# Altium PCB PCB.PcbDoc (part 1 of 2)
Units mil, origin at the board's own origin, x right, y up, seen from the top; angles counter-clockwise.
Board outline 1030 x 1437.5 mil, 4 copper layers (Top Layer, Layer 1, Layer 2, Bottom Layer), stack 23.756 mil thick; 67 components, 63 nets, 297 pads, 88 vias.
Unrouted connection lines stored in the file: 37.
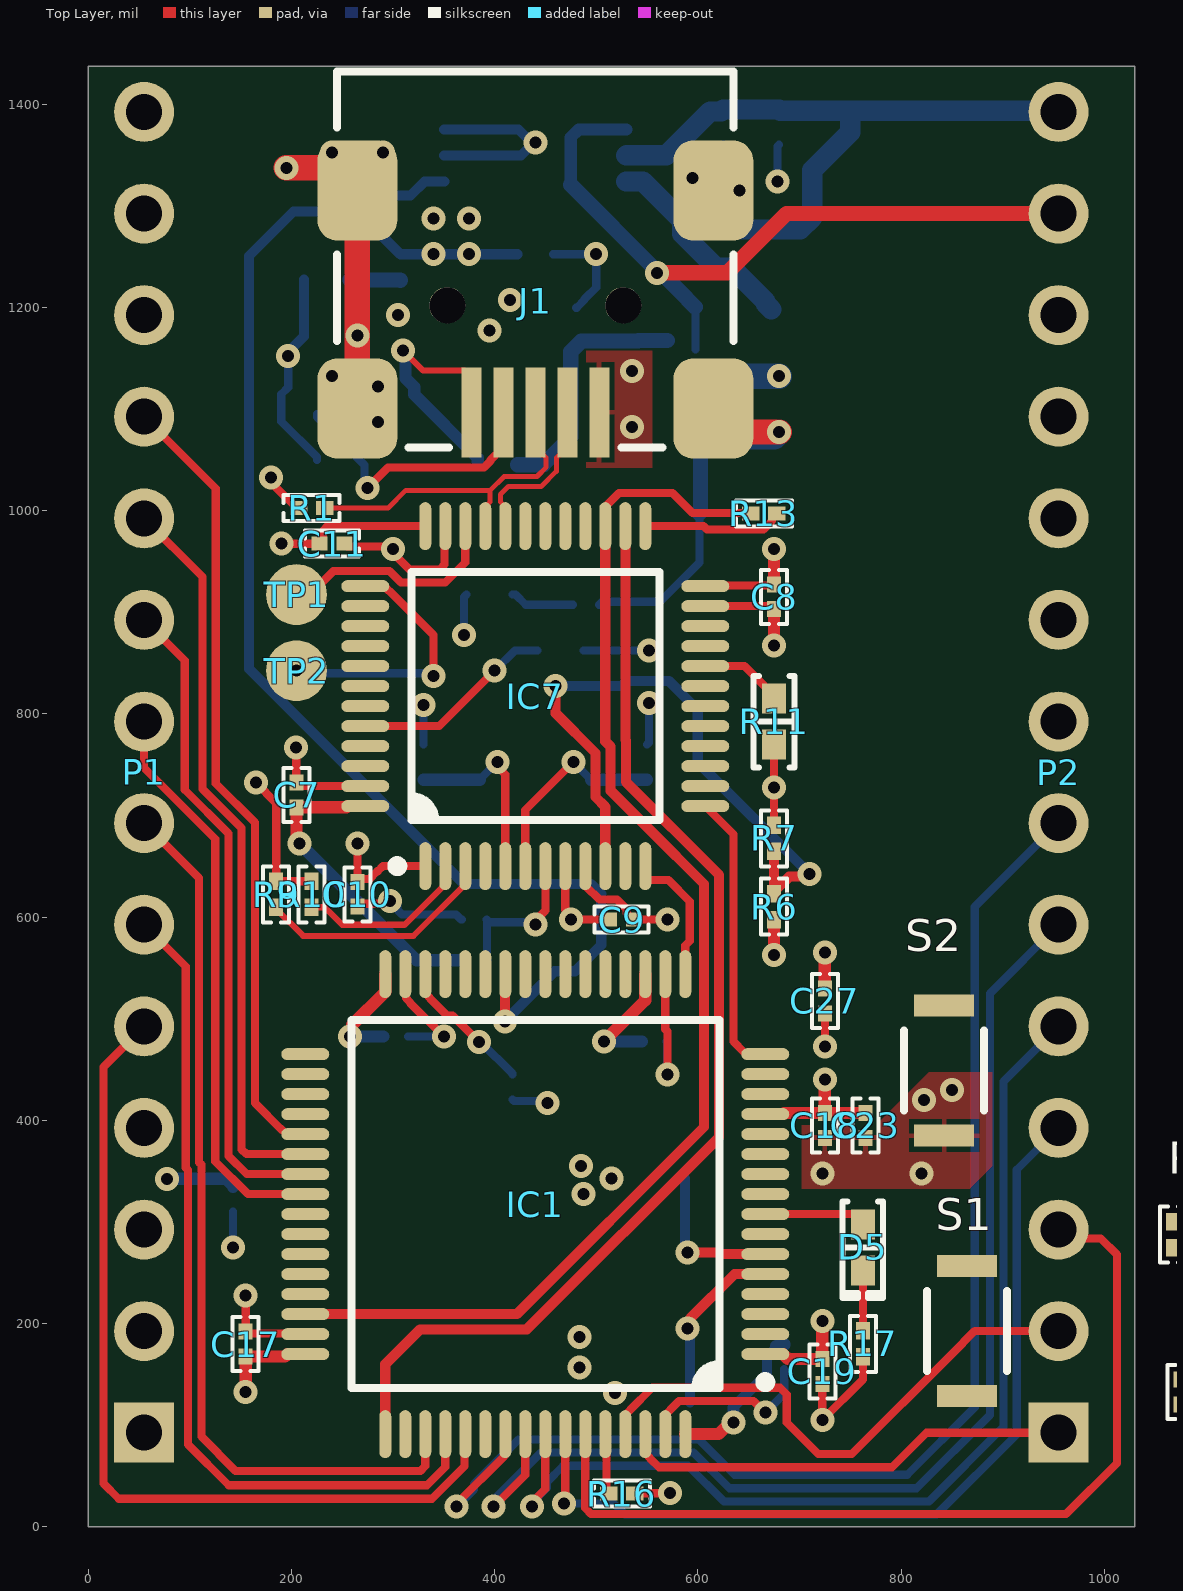
[diagram p0: Top Layer view]
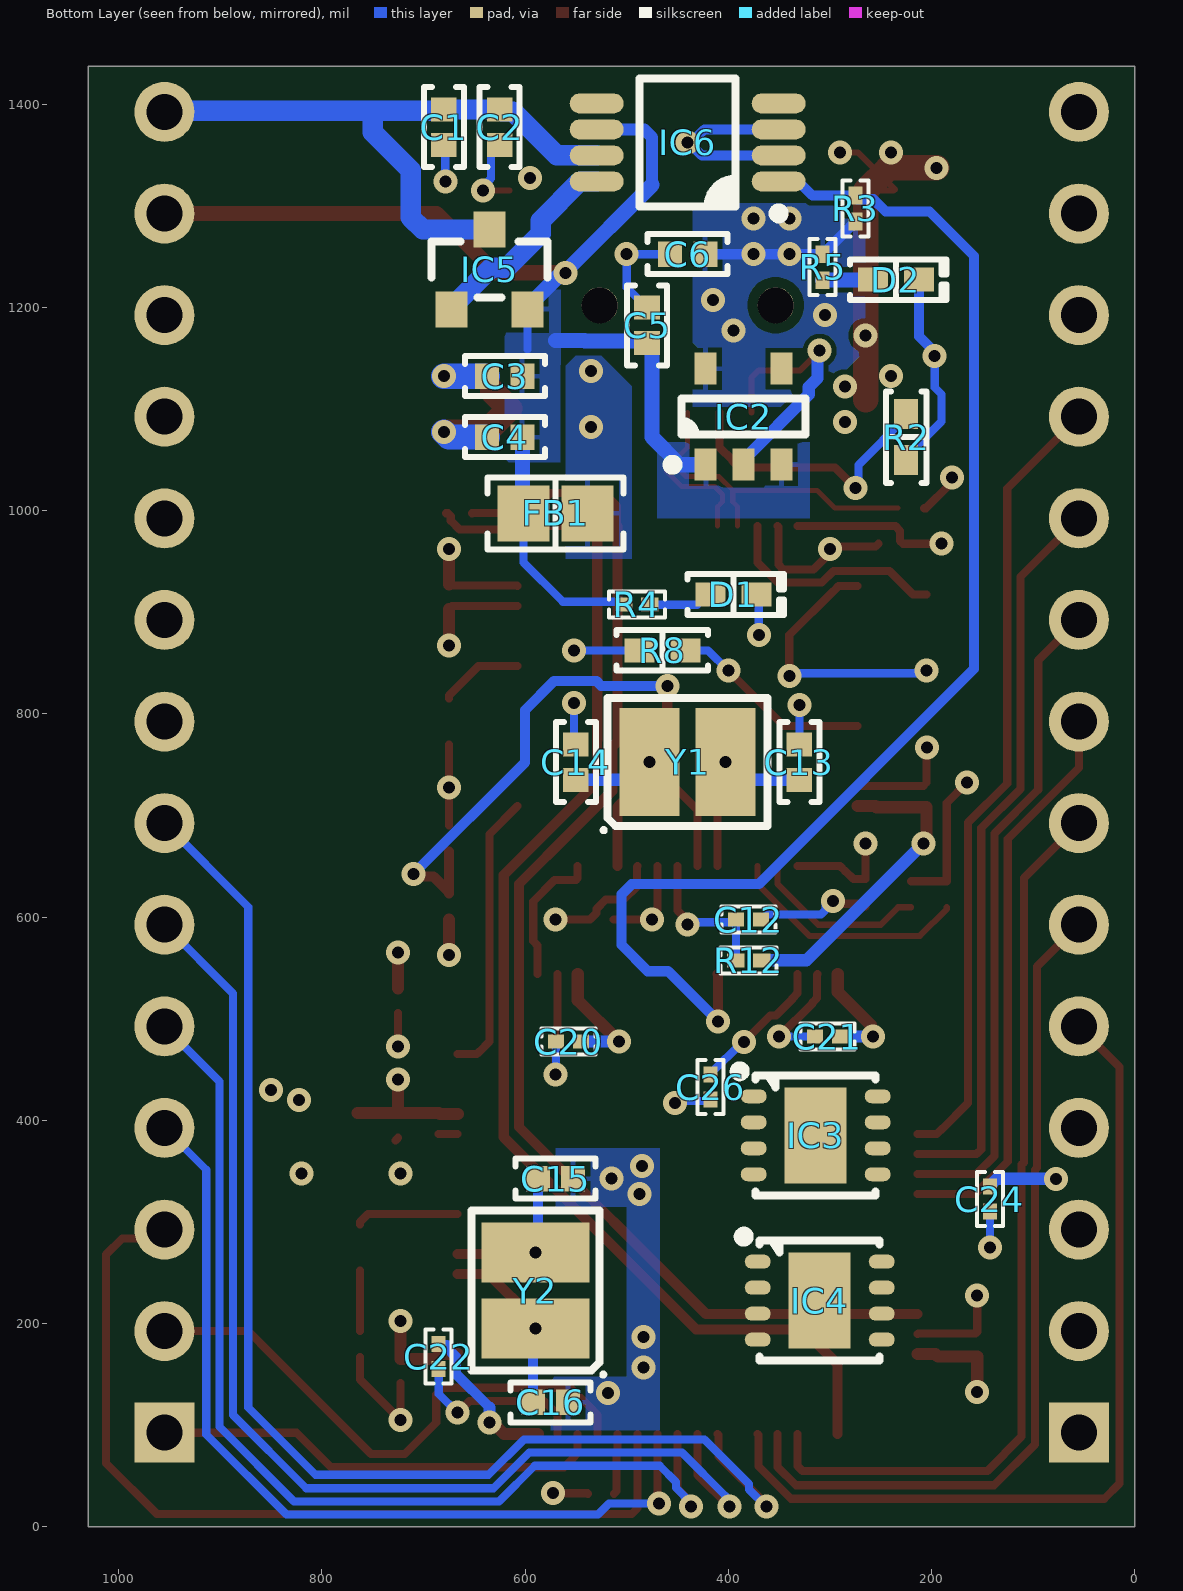
[diagram p1: Bottom Layer view, seen from below]
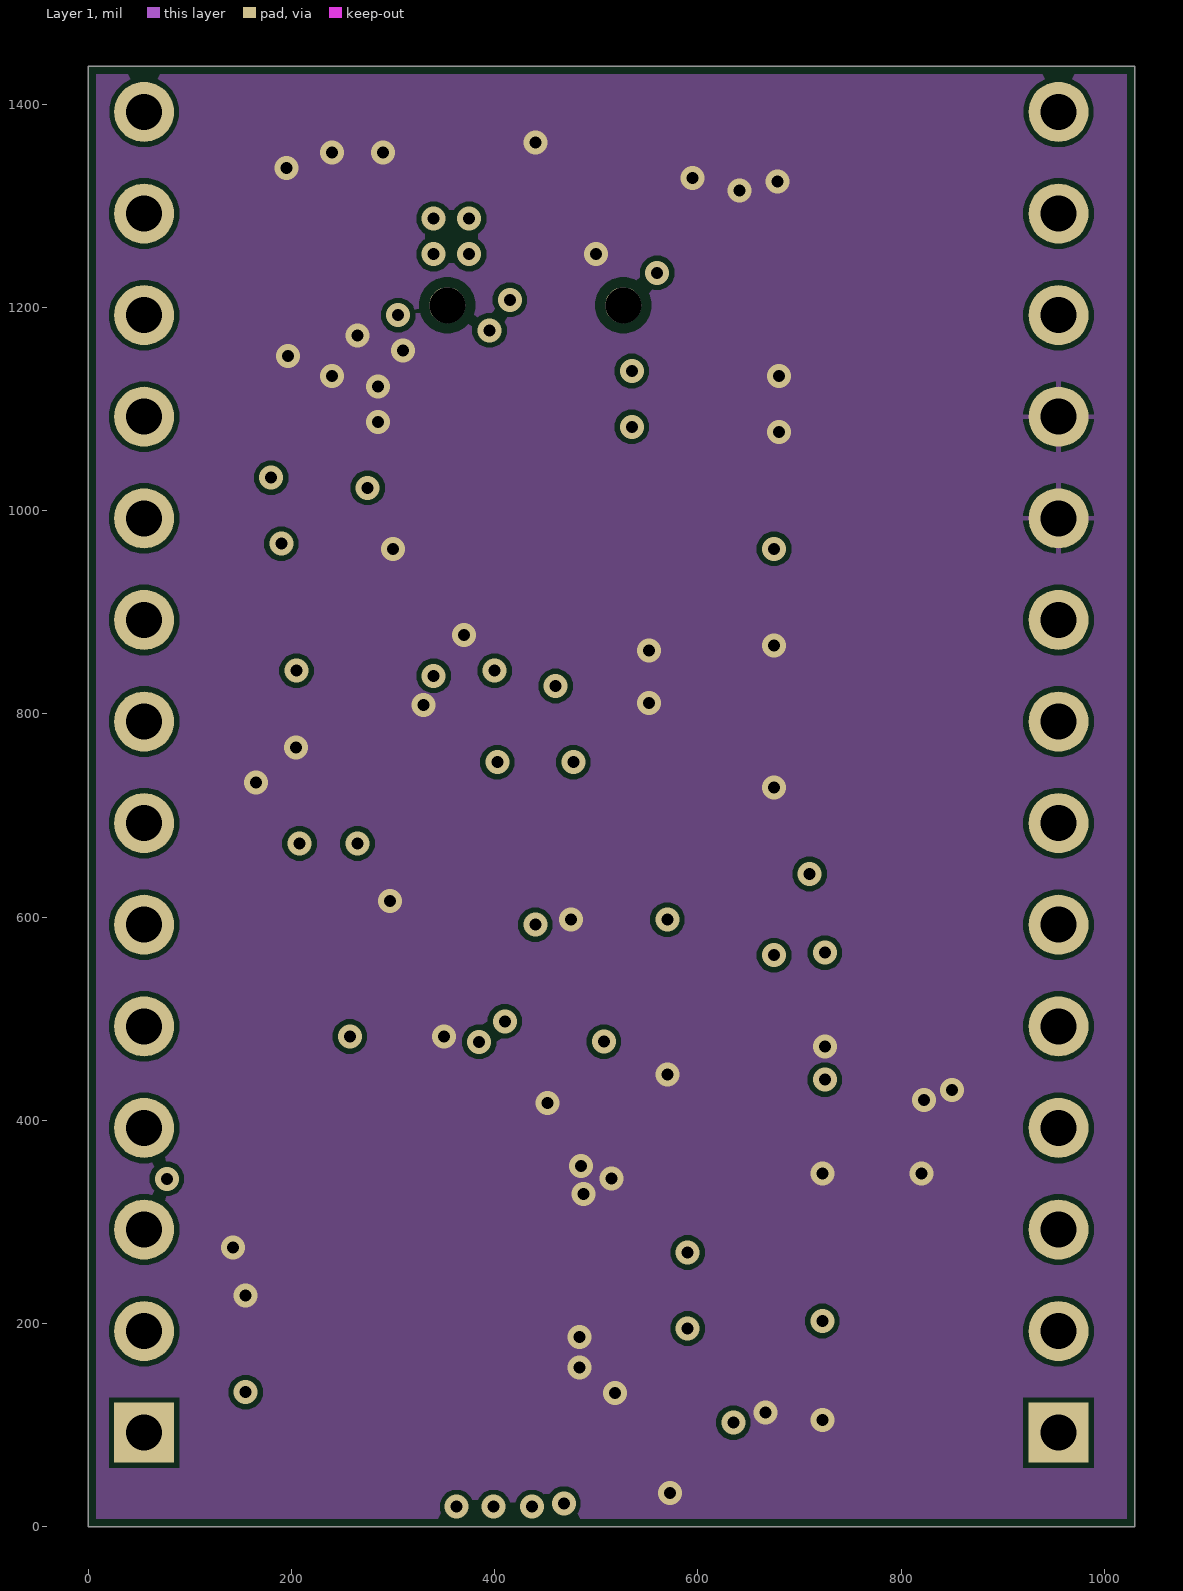
[diagram p2: Layer 1]
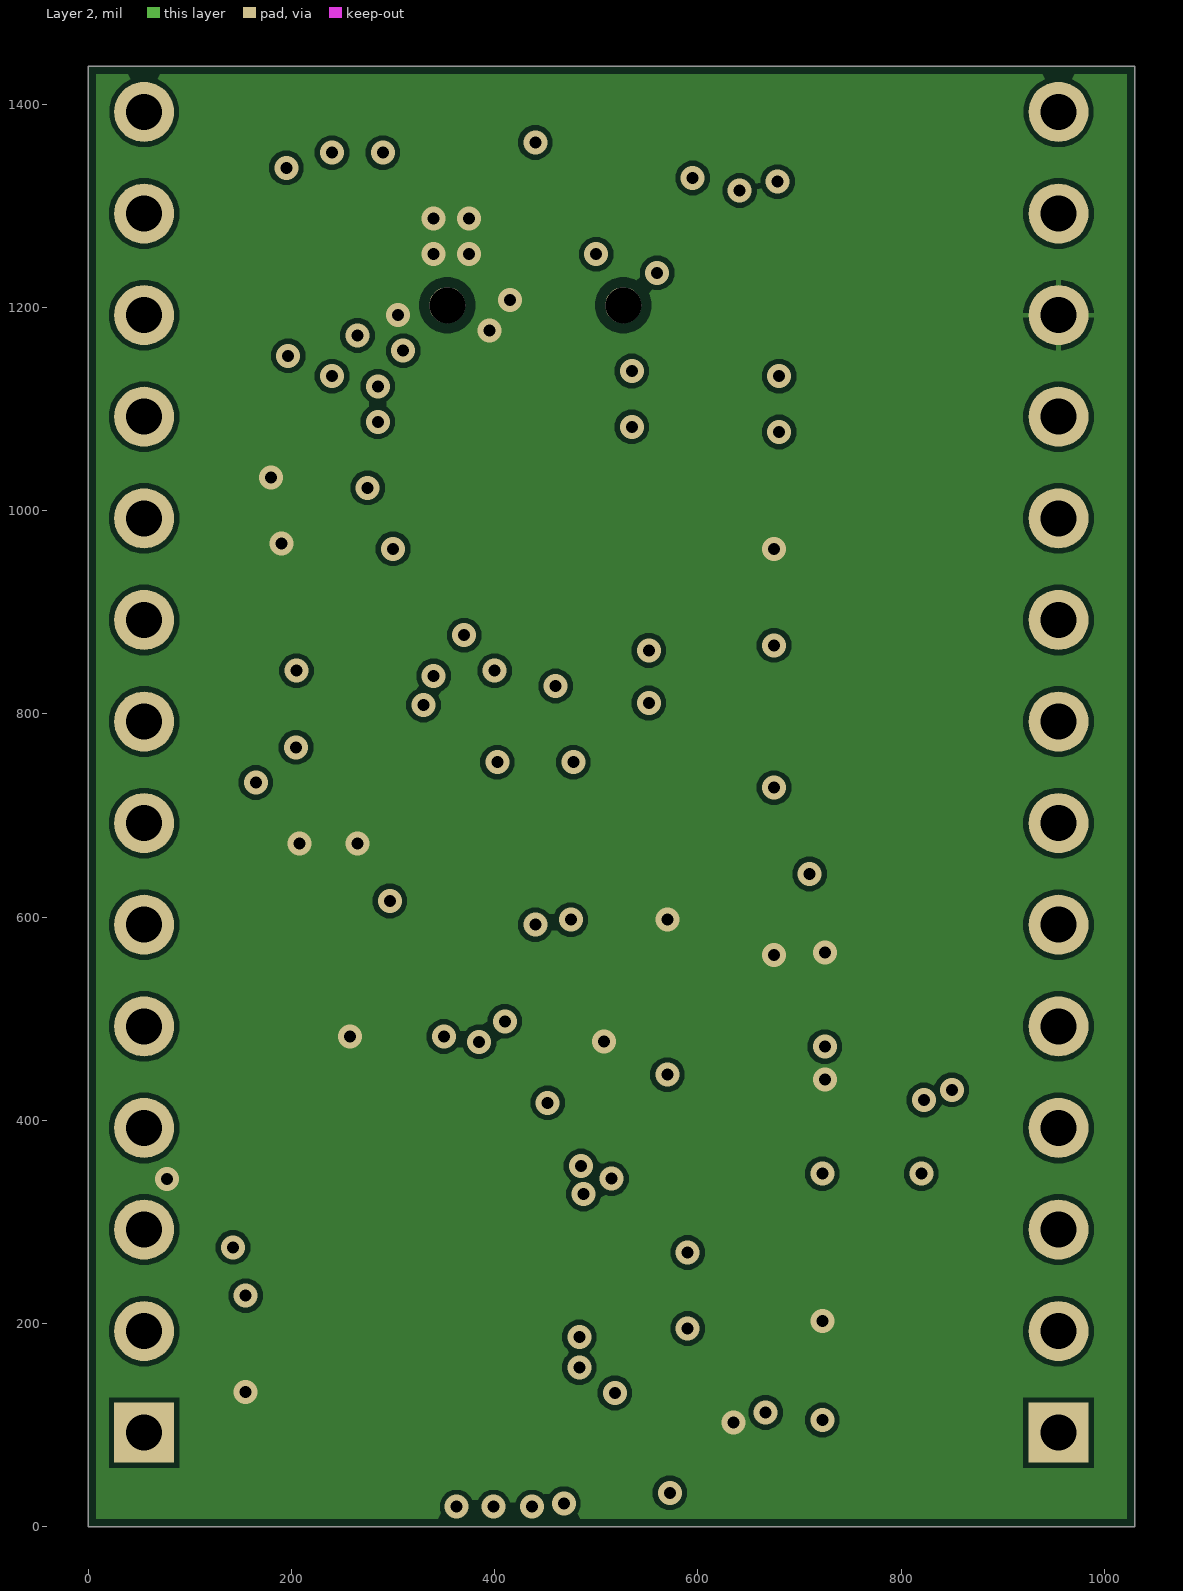
[diagram p3: Layer 2]

## Layer stack, top to bottom
Top Solder: solder mask 0.4, Solder Resist, Dk 3.5
Top Layer: signal copper 1.4
Dielectric 2: prepreg 2.8, PP-006, Dk 4.1
Layer 1: signal copper 1.378
Dielectric 1: dielectric 12.6, FR-4, Dk 4.8
Layer 2: signal copper 1.378
Dielectric 3: prepreg 2.8, PP-006, Dk 4.1
Bottom Layer: signal copper 1.4
Bottom Solder: solder mask 0.4, Solder Resist, Dk 3.5

## Board outline
0,0 1030,0 1030,1437.5 0,1437.5

## Design rules (kind name [scope] priority, off if disabled: settings)
BoardOutlineClearance [All] p1: gap=7.87 ignorepadtopadclearanceinfootprint=FALSE
Clearance [All] p1: gap=5 ignorepadtopadclearanceinfootprint=FALSE except(9.84: Arc-Hole Track-Hole SMDPad-Hole THPad-Hole Via-Hole Fill-Hole Poly-Hole Region-Hole Text-Hole)
ComponentClearance [All] p1: gap=5 collisioncheckmode=3 verticalgap=5 showdistances=TRUE
DiffPairsRouting [All] p1: maxlimit=10 minlimit=5 mostfreqgap=10 toplayer_prefgap=5 toplayer_minwidth=5 toplayer_maxwidth=1000 toplayer_prefwidth=5 midlayer1_mingap=10 midlayer1_minwidth=15 midlayer1_maxwidth=15 midlayer1_prefwidth=15 midlayer2_mingap=10 midlayer2_minwidth=15 midlayer2_maxwidth=15 midlayer2_prefwidth=15 bottomlayer_prefgap=5 bottomlayer_minwidth=5 bottomlayer_maxwidth=1000 bottomlayer_prefwidth=5 maxuncoupledlength=500
Height [All] p1: minheight=0 maxheight=71497.94 prefheight=500
HoleSize [All] p1: absolutevalues=TRUE maxlimit=248.03 minlimit=11.81 maxpercent=80.000 minpercent=20.000
HoleToHoleClearance [All] p1: gap=9.84 allowstackedmicrovias=FALSE
MinimumAnnularRing [All] p1: minimumring=3
MinimumSolderMaskSliver [All] p1: minsoldermaskwidth=0
PlaneClearance [All] p1: clearance=5
PlaneConnect PlaneConnectPowerPads [InPadClass('PowerPads')] p1: planeconnectstyle=Direct reliefexpansion=20 reliefentries=4 reliefconductorwidth=10 reliefairgap=10
PlaneConnect [All] p2: pad.planeconnectstyle=Relief pad.reliefexpansion=11.81 pad.reliefentries=4 pad.reliefconductorwidth=5 pad.reliefairgap=5 via.planeconnectstyle=Direct via.reliefexpansion=11.81 via.reliefentries=4 via.reliefconductorwidth=5 via.reliefairgap=5
PolygonConnect PolygonConnectPowerPads [All vs (InPadClass('PowerPads'))] p1: connectstyle=Direct reliefconductorwidth=10 reliefentries=4 polygonreliefangle="90 Angle" airgapwidth=10
PolygonConnect [All] p2: thpad.connectstyle=Relief thpad.reliefconductorwidth=5 thpad.reliefentries=4 thpad.polygonreliefangle="90 Angle" thpad.airgapwidth=5 smdpad.connectstyle=Relief smdpad.reliefconductorwidth=5 smdpad.reliefentries=4 smdpad.polygonreliefangle="90 Angle" smdpad.airgapwidth=5 via.connectstyle=Direct via.reliefconductorwidth=5 via.reliefentries=4 via.polygonreliefangle="90 Angle" via.airgapwidth=5
RoutingVias [All] p1: holewidth=11.81 width=23.62 viastyle="Through Hole" minholewidth=11.81 minwidth=23.62 maxholewidth=23.62 maxwidth=259.84
SilkToSilkClearance [All] p1: silktosilkclearance=0
SilkToSolderMaskClearance [IsPad] p1: minsilkscreentomaskgap=5 clearancetoexposedcopper=TRUE
SolderMaskExpansion [All] p1: expansion=2.95 istentingtop=FALSE
Width [All] p1: maxlimit=1000 minlimit=4 preferedwidth=6 midlayer1_minwidth=5 midlayer1_maxwidth=10 midlayer1_prefwidth=5 midlayer2_minwidth=5 midlayer2_maxwidth=10 midlayer2_prefwidth=5 minimp=50.000000 maximp=50.000000 favimp=50.000000
20 further rules are at their usual default settings.

## Classes and differential pairs
component class MCU: C15 C16 C17 C18 C19 C20 C21 C22 C23 C24 C25 C26 C27 D5 IC1 R16 R17 S1 Y2
component class CAN: C28 C29 C30 C31 IC3 IC4 R18
component class Power: C1 C2 C3 C4 C5 C6 D1 D2 IC2 IC5 IC6 R3 R4 R5
component class Connectors: FB1 J1 P1 P2 R1 R2
component class Debugger: C7 C8 C9 C10 C11 C12 C13 C14 IC7 R6 R7 R8 R9 R10 R11 R12 R13 S2 TP1 TP2 Y1
differential pair CAN2: +CAN2_P -CAN2_N
differential pair CAN1: +CAN1_P -CAN1_N
differential pair USB_D: +USB_D_P -USB_D_N

## Components (designator, comment, footprint, x,y, rotation, side; value= is the part's Value field where it differs from the comment)
C1 "10µF" "CAP 0402_1005" 680,1377.5 r90 bottom
C2 "0.1µF" "CAP 0402_1005" 625,1377.5 r90 bottom
C3 "10µF" "CAP 0402_1005" 620,1132.5 r180 bottom
C4 "0.1µF" "CAP 0402_1005" 620,1072.5 r180 bottom
C5 "1µF" "CAP 0402_1005" 480,1182.5 r270 bottom
C6 "1µF" "CAP 0402_1005" 440,1252.5 r180 bottom
C7 "0.1µF" "CAP 0201_0603" 205,720.3 r270 top
C8 "0.1µF" "CAP 0201_0603" 675,915.3 r90 top
C9 "0.1µF" "CAP 0201_0603" 525,597.5 r0 top
C10 "0.1µF" "CAP 0201_0603" 265,622.5 r90 top
C11 "0.1µF" "CAP 0201_0603" 240,967.5 r180 top
C12 "0.1µF" "CAP 0201_0603" 380,597.5 r0 bottom
C13 "8pF" "CAP 0402_1005" 330,752.5 r270 bottom
C14 "8pF" "CAP 0402_1005" 550,752.5 r270 bottom
C15 "8pF" "CAP 0402_1005" 570,342.5 r0 bottom
C16 "8pF" "CAP 0402_1005" 575,122.5 r0 bottom
C17 "0.1µF" "CAP 0201_0603" 155,179.7 r270 top
C18 "0.1µF" "CAP 0201_0603" 725,395 r90 top
C19 "0.1µF" "CAP 0201_0603" 722.5,152.8 r90 top
C20 "0.1µF" "CAP 0201_0603" 557.2,477.5 r180 bottom
C21 "0.1µF" "CAP 0201_0603" 302.5,482.5 r180 bottom
C22 "0.1µF" "CAP 0201_0603" 685,167.5 r90 bottom
C23 "1µF" "CAP 0201_0603" 765,395 r90 top
C24 "1µF" "CAP 0201_0603" 142.5,322.5 r90 bottom
C25 "0.1µF" "CAP 0201_0603" 4380,952.5 r90 top
C26 "2.2µF" "CAP 0201_0603" 417.5,432.8 r270 bottom
C27 "4.7µF" "CAP 0201_0603" 725,517.5 r90 top
C28 "0.1µF" "CAP 0201_0603" 1520,132.5 r90 top
C29 "0.1µF" "CAP 0201_0603" 1750,132.5 r90 top
C30 "0.1µF" "CAP 0201_0603" 1075,132.5 r90 top
C31 "0.1µF" "CAP 0201_0603" 1310,132.5 r90 top
D1 "Green" "LED 0402_1005 GREEN" 395,917.5 r180 bottom
D2 "Yellow" "LED 0402_1005 YELLOW" 235,1227.5 r180 bottom
D5 "Blue" "LED 0402_1005 BLUE" 762.5,275 r270 top
FB1 "120 Ohms @ 100MHz" "FER 0805_2012" 570,997.5 r0 bottom
IC1 "STM32F446RET7" "ST LQFP-64 10X10MM" 440,317.5 r180 top
IC2 "AP2112K-3.3TRG1" "DIODES SOT-23-5 W5" 385,1092.5 r90 bottom
IC3 "MCP2542FDT-E/MF" "MICROCHIP DFN-8 3X3MM" 313.98,385.3 r180 bottom
IC4 "MCP2542FDT-E/MF" "MICROCHIP DFN-8 3X3MM" 310,222.5 r180 bottom
IC5 "DMP3099L-7" "DIODES SOT-23-3" 635,1237.5 r90 bottom
IC6 "LTC4414IMS8#PBF" "ANALOG MSOP-8 RM-8" 440,1362.5 r0 bottom
IC7 "STM32F103CBT6" "ST LQFP-48 7X7MM" 440,817.5 r90 top
J1 "10033526-N3212LF" "FCI USB 10033526-N3212LF" 440,1247.5 r0 top
P1 "Header 14" HDR1X14 55,92.5 r90 top
P2 "Header 14" HDR1X14 955,92.5 r90 top
R1 "1.5 kOhms" "RES 0201_0603" 220,1002.5 r180 top
R2 "100 kOhms" "RES 0402_1005" 225,1072.5 r90 bottom
R3 "100 kOhms" "RES 0201_0603" 275,1297.5 r270 bottom
R4 "340 Ohms" "RES 0201_0603" 490,907.5 r0 bottom
R5 "220 Ohms" "RES 0201_0603" 307.2,1239.7 r90 bottom
R6 "4.7 kOhms" "RES 0201_0603" 675,610.3 r270 top
R7 "4.7 kOhms" "RES 0201_0603" 675,677.5 r270 top
R8 "100 kOhms" "RES 0402_1005" 465,862.5 r180 bottom
R9 "10 kOhms" "RES 0201_0603" 185,622.5 r90 top
R10 "10 kOhms" "RES 0201_0603" 220,622.5 r270 top
R11 "JUMPER" "RES 0402_1005" 675,792.5 r90 top
R12 "100 kOhms" "RES 0201_0603" 380,557.5 r180 bottom
R13 "100 Ohms" "RES 0201_0603" 665,997.5 r0 top
R16 "10 kOhms" "RES 0201_0603" 525.3,32.5 r180 top
R17 "220 Ohms" "RES 0201_0603" 762.5,180 r270 top
R18 "120 Ohms" "RES 0201_0603" 1067.5,287.5 r90 top
S1 "KXT341 LHS" "C&K KXT3" 865,192.5 r90 top
S2 "KXT341 LHS" "C&K KXT3" 842.5,448.98 r90 top
TP1 "Test Point" TP1 205,917.5 r0 top
TP2 "Test Point" TP1 205,842.5 r90 top
Y1 "8MHz" "NDK NX3225GD" 440,752.5 r180 bottom
Y2 "8MHz" "NDK NX3225GD" 590,232.5 r90 bottom

## Footprints (in the part's own frame and the unit in brackets; to place one, negate y for a bottom-side part, rotate by r counter-clockwise, add the part's x,y. Pads: shape width x height; smd on the part's side, far side on the other; paste and mask are expansions set on the pad)
"ANALOG MSOP-8 RM-8" [mm]
  oval 1.35x0.5 smd: 1(-2.275,0.975) 2(-2.275,0.325) 3(-2.275,-0.325) 4(-2.275,-0.975) 5(2.275,-0.975) 6(2.275,-0.325) 7(2.275,0.325) 8(2.275,0.975)
  silkscreen extent -2.4,-1.6 1.2,1.9, body extent -2.46,-1.5 2.46,1.5, height 1.1
"C&K KXT3" [mm]
  rect 0.55x1.5 smd: 1(-1.625,0) 2(1.625,0)
  silkscreen extent -1,-1 1,1, body extent -1.75,-1 1.75,1, height 0.58
"CAP 0201_0603" [mm] "Chip Capacitor, 2-Leads, Body 0.60x0.30mm, IPC Medium Density"
  rect 0.4x0.35 smd: 1(-0.31,0) 2(0.31,0)
  silkscreen extent -0.67,-0.33 0.67,0.33, body extent -0.3,-0.15 0.3,0.15, height 0.3
"CAP 0402_1005" [mm] "Chip Capacitor, 2-Leads, Body 1.02x0.51mm, IPC Medium Density"
  rect 0.6x0.64 smd: 1(-0.44,0) 2(0.44,0)
  silkscreen extent -1,-0.5 1,0.5, body extent -0.5,-0.26 0.5,0.26, height 0.52
"DIODES SOT-23-3" [mm] "SOT23, 3-Leads, Body 2.90x2.40mm, Pitch 0.95mm, IPC Medium Density"
  rect 0.9x0.8 smd: 1(-1,0.95) 2(-1,-0.95) 3(1,0)
  silkscreen extent -0.7,-1.45 0.7,1.45, body extent -1.41,-1.45 1.41,1.45, height 1.5
"DIODES SOT-23-5 W5" [mm] "SOT23, 5-Leads, Body 3.00x2.85mm, Pitch 0.95mm, IPC Medium Density"
  rect 0.8x0.55 smd: 1(-1.2,0.95) 2(-1.2,0) 3(-1.2,-0.95) 4(1.2,-0.95) 5(1.2,0.95)
  silkscreen extent -1.32,-1.55 0.45,1.9, body extent -1.41,-1.45 1.41,1.45, height 1.5
"FCI USB 10033526-N3212LF" [mm] "USB 2.0 Type B Mini"
  rect 0.5x2.25 smd: 1(1.6,-3.826) 2(0.8,-3.826) 3(0,-3.826) 4(-0.8,-3.826) 5(-1.6,-3.826)
  round 0.9 hole 0.9 unplated: M(-2.2,-1.151) M(2.2,-1.151)
  rrect50% 2x2.5 smd: S(-4.45,-3.731) S(-4.45,1.719) S(4.45,-3.731) S(4.45,1.719)
  silkscreen extent -4.95,-4.71 4.95,4.69, body extent -4.95,-4.7 4.95,4.7, height 4.01
"FER 0805_2012" [mm] "Chip Ferrite, 2-Leads, Body 2.00x1.20mm, IPC Medium Density"
  rect 1.3x1.4 smd: 1(-0.8,0) 2(0.8,0)
  silkscreen extent -1.7,-0.9 1.7,0.9, body extent -1,-0.64 1,0.64, height 1.26
HDR1X14 [mm] "Connector; Header; 14 Position"
  rect 1.5x1.5 hole 0.9: 1(0,0)
  round 1.5 hole 0.9: 2(2.54,0) 3(5.08,0) 4(7.62,0) 5(10.16,0) 6(12.7,0) 7(15.24,0) 8(17.78,0) 9(20.32,0) 10(22.86,0) 11(25.4,0) 12(27.94,0) 13(30.48,0) 14(33.02,0)
"LED 0402_1005 BLUE" [mm] "Chip Diode, 2-Leads, Body 1.00x0.50mm, IPC Medium Density"
  rect 0.75x0.6 smd: 1(-0.575,0) 2(0.575,0)
  silkscreen extent -1.14,-0.51 1.27,0.51, body extent -0.5,-0.25 0.5,0.25, height 0.21
"LED 0402_1005 GREEN" [mm] "Chip Diode, 2-Leads, Body 1.00x0.50mm, IPC Medium Density"
  rect 0.75x0.6 smd: 1(-0.575,0) 2(0.575,0)
  silkscreen extent -1.14,-0.51 1.27,0.51, body extent -0.5,-0.25 0.5,0.25, height 0.21
"LED 0402_1005 YELLOW" [mm] "Chip Diode, 2-Leads, Body 1.00x0.50mm, IPC Medium Density"
  rect 0.75x0.6 smd: 1(-0.575,0) 2(0.575,0)
  silkscreen extent -1.14,-0.51 1.27,0.51, body extent -0.5,-0.25 0.5,0.25, height 0.21
"MICROCHIP DFN-8 3X3MM" [mm] "DFN, 8-Leads, Body 3.00x3.00mm, Pitch 0.65mm, Thermal Pad 1.50x2.0mm, IPC Medium Density"
  oval 0.65x0.35 smd: 1(-1.55,0.975) 2(-1.55,0.325) 3(-1.55,-0.325) 4(-1.55,-0.975) 5(1.55,-0.975) 6(1.55,-0.325) 7(1.55,0.325) 8(1.55,0.975)
  rect 1.55x2.4 smd: 9(0,0)
  silkscreen extent -2.02,-1.5 1.5,1.72, body extent -1.5,-1.5 1.5,1.5, height 1.05
"NDK NX3225GD" [mm] "Crystal, 2-Leads, Body 2.50x3.20mm"
  rect 1.5x2.7 smd: 1(-0.95,0) 2(0.95,0)
  silkscreen extent -2.15,-1.75 2,1.6, body extent -1.6,-1.25 1.6,1.25, height 1
"RES 0201_0603" [mm] "Chip Resistor, 2-Leads, Body 0.60x0.30mm, IPC Medium Density"
  rect 0.44x0.35 smd: 1(-0.325,0) 2(0.325,0)
  silkscreen extent -0.7,-0.33 0.7,0.33, body extent -0.3,-0.15 0.3,0.15, height 0.21
"RES 0402_1005" [mm] "Chip Resistor, 2-Leads, Body 1.0x0.5mm, IPC Medium Density"
  rect 0.75x0.6 smd: 1(-0.575,0) 2(0.575,0)
  silkscreen extent -1.14,-0.51 1.14,0.51, body extent -0.5,-0.25 0.5,0.25, height 0.35
"ST LQFP-48 7X7MM" [mm] "LQFP, 48-Leads, Body 7.00x7.00mm, Pitch 0.50mm, IPC Medium Density"
  oval 1.2x0.3 smd: 1(-4.25,2.75) 2(-4.25,2.25) 3(-4.25,1.75) 4(-4.25,1.25) 5(-4.25,0.75) 6(-4.25,0.25) 7(-4.25,-0.25) 8(-4.25,-0.75) 9(-4.25,-1.25) 10(-4.25,-1.75) 11(-4.25,-2.25) 12(-4.25,-2.75) 25(4.25,-2.75) 26(4.25,-2.25) 27(4.25,-1.75) 28(4.25,-1.25) 29(4.25,-0.75) 30(4.25,-0.25) 31(4.25,0.25) 32(4.25,0.75) 33(4.25,1.25) 34(4.25,1.75) 35(4.25,2.25) 36(4.25,2.75)
  oval 0.3x1.2 smd: 13(-2.75,-4.25) 14(-2.25,-4.25) 15(-1.75,-4.25) 16(-1.25,-4.25) 17(-0.75,-4.25) 18(-0.25,-4.25) 19(0.25,-4.25) 20(0.75,-4.25) 21(1.25,-4.25) 22(1.75,-4.25) 23(2.25,-4.25) 24(2.75,-4.25) 37(2.75,4.25) 38(2.25,4.25) 39(1.75,4.25) 40(1.25,4.25) 41(0.75,4.25) 42(0.25,4.25) 43(-0.25,4.25) 44(-0.75,4.25) 45(-1.25,4.25) 46(-1.75,4.25) 47(-2.25,4.25) 48(-2.75,4.25)
  silkscreen extent -4.37,-3.1 3.1,3.57, body extent -4.51,-4.51 4.51,4.51, height 1.55
"ST LQFP-64 10X10MM" [mm] "LQFP, 64-Leads, Body 10.00x10.00mm, Pitch 0.50mm, IPC Medium Density"
  oval 1.2x0.3 smd: 1(-5.75,3.75) 2(-5.75,3.25) 3(-5.75,2.75) 4(-5.75,2.25) 5(-5.75,1.75) 6(-5.75,1.25) 7(-5.75,0.75) 8(-5.75,0.25) 9(-5.75,-0.25) 10(-5.75,-0.75) 11(-5.75,-1.25) 12(-5.75,-1.75) 13(-5.75,-2.25) 14(-5.75,-2.75) 15(-5.75,-3.25) 16(-5.75,-3.75) 33(5.75,-3.75) 34(5.75,-3.25) 35(5.75,-2.75) 36(5.75,-2.25) 37(5.75,-1.75) 38(5.75,-1.25) 39(5.75,-0.75) 40(5.75,-0.25) 41(5.75,0.25) 42(5.75,0.75) 43(5.75,1.25) 44(5.75,1.75) 45(5.75,2.25) 46(5.75,2.75) 47(5.75,3.25) 48(5.75,3.75)
  oval 0.3x1.2 smd: 17(-3.75,-5.75) 18(-3.25,-5.75) 19(-2.75,-5.75) 20(-2.25,-5.75) 21(-1.75,-5.75) 22(-1.25,-5.75) 23(-0.75,-5.75) 24(-0.25,-5.75) 25(0.25,-5.75) 26(0.75,-5.75) 27(1.25,-5.75) 28(1.75,-5.75) 29(2.25,-5.75) 30(2.75,-5.75) 31(3.25,-5.75) 32(3.75,-5.75) 49(3.75,5.75) 50(3.25,5.75) 51(2.75,5.75) 52(2.25,5.75) 53(1.75,5.75) 54(1.25,5.75) 55(0.75,5.75) 56(0.25,5.75) 57(-0.25,5.75) 58(-0.75,5.75) 59(-1.25,5.75) 60(-1.75,5.75) 61(-2.25,5.75) 62(-2.75,5.75) 63(-3.25,5.75) 64(-3.75,5.75)
  silkscreen extent -5.88,-4.6 4.6,4.6, body extent -6.01,-6.01 6.01,6.01, height 1.6
TP1 [mil] "60 mil radius test point"
  round 60 smd: 1(0,0)

## Part data
C1 C3: library part CL05A106MP8NUB8, "CAP CER 10UF 10V X5R 0402", Device Package="0402 (1005 Metric)", Manufacturer="Samsung Electro-Mechanics", Operating Temperature="-55°C ~ 85°C", Supplier Part Number 1=1276-6830-1-ND, Temperature Coefficient=X5R, Tolerance=±20%, Voltage - Rated=10V, Applications="General Purpose", Capacitance=10µF, ComponentLink1Description=Datasheet, ComponentLink1URL=http://www.samsungsem.com/kr/support/product-search/mlcc/CL05A106MP8NUB8.jsp, ComponentLink2Description="DigiKey Link", ComponentLink2URL=http://digikey.com/product-detail/en/samsung-electro-mechanics/CL05A106MP8NUB8/1276-6830-1-ND/5961689, LastUpdated="2020-09-02 1:02:25 AM", Lifecycle Status=Active, Minimum Order=1, Mounting Type="Surface Mount, MLCC", Package / Case="0402 (1005 Metric)", Packaging=TapeAndReel, Part Number=CL05A106MP8NUB8, Part Status=Active, PartId=1758, Price=0.08, Series=CL, Size / Dimension="0.039\" L x 0.020\" W (1.00mm x 0.50mm)", Supplier 1=DigiKey, Thickness (Max)="0.035\" (0.90mm)"
C2 C4: library part C0402C104K4RECAUTO, "CAP CER 0402 0.1UF 16V X7R 10%", Device Package="0402 (1005 Metric)", Manufacturer=KEMET, Operating Temperature="-55°C ~ 125°C", Ratings=AEC-Q200, Supplier Part Number 1=399-17167-1-ND, Temperature Coefficient=X7R, Tolerance=±10%, Voltage - Rated=16V, Applications="Automotive, ESD Protection", Capacitance=0.1µF, ComponentLink1Description=Datasheet, ComponentLink1URL=https://api.kemet.com/component-edge/download/datasheet/C0402C104K4RECAUTO.pdf, ComponentLink2Description="DigiKey Link", ComponentLink2URL=http://digikey.com/product-detail/en/kemet/C0402C104K4RECAUTO/399-17167-1-ND/8563708, LastUpdated="2020-09-02 1:02:25 AM", Lifecycle Status=Active, Minimum Order=1, Mounting Type="Surface Mount, MLCC", Package / Case="0402 (1005 Metric)", Packaging=TapeAndReel, Part Number=C0402C104K4RECAUTO, Part Status=Active, PartId=1731, Price=0.02, Series="ESD SMD Auto X7R", Size / Dimension="0.039\" L x 0.020\" W (1.00mm x 0.50mm)", Supplier 1=DigiKey, Thickness (Max)="0.022\" (0.55mm)"
C5 C6: library part 0402ZD105KAT4A, "CAP CER 1UF 10V X5R 0402", Device Package="0402 (1005 Metric)", Manufacturer="AVX Corporation", Operating Temperature="-55°C ~ 85°C", Supplier Part Number 1=478-10063-1-ND, Temperature Coefficient=X5R, Tolerance=±10%, Voltage - Rated=10V, Applications="General Purpose", Capacitance=1µF, ComponentLink1Description=Datasheet, ComponentLink1URL=http://datasheets.avx.com/cx5r.pdf, ComponentLink2Description="DigiKey Link", ComponentLink2URL=http://digikey.com/product-detail/en/avx-corporation/0402ZD105KAT4A/478-10063-1-ND/6564285, LastUpdated="2020-09-02 1:02:25 AM", Lifecycle Status=Active, Minimum Order=1, Mounting Type="Surface Mount, MLCC", Package / Case="0402 (1005 Metric)", Packaging=TapeAndReel, Part Number=0402ZD105KAT4A, Part Status=Active, PartId=1846, Price=0.02, Series=-, Size / Dimension="0.039\" L x 0.020\" W (1.00mm x 0.50mm)", Supplier 1=DigiKey, Thickness (Max)="0.022\" (0.56mm)"
C7 C8 C9 C10 C11 C12 C17 C18 C19 C20 C21 C22 C25 C28 C29 C30 C31: library part EMK063BJ104KP-F, "CAP CER 0.1UF 16V X5R 0201", Device Package="0201 (0603 Metric)", Manufacturer="Taiyo Yuden", Operating Temperature="-55°C ~ 85°C", Supplier Part Number 1=587-5833-1-ND, Temperature Coefficient=X5R, Tolerance=±10%, Voltage - Rated=16V, Applications="General Purpose", Capacitance=0.1µF, ComponentLink1Description=Datasheet, ComponentLink1URL="https://ds.yuden.co.jp/TYCOMPAS/ut/detail?pn=EMK063BJ104KP-F  &u=M", ComponentLink2Description="DigiKey Link", ComponentLink2URL=http://digikey.com/product-detail/en/taiyo-yuden/EMK063BJ104KP-F/587-5833-1-ND/7674954, LastUpdated="2020-09-02 1:00:18 AM", Lifecycle Status=Active, Minimum Order=1, Mounting Type="Surface Mount, MLCC", Package / Case="0201 (0603 Metric)", Packaging=TapeAndReel, Part Number=EMK063BJ104KP-F, Part Status=Active, PartId=12, Price=0.02, Series=M, Size / Dimension="0.024\" L x 0.012\" W (0.60mm x 0.30mm)", Supplier 1=DigiKey, Thickness (Max)="0.013\" (0.33mm)"
C13 C14 C15 C16: library part C1005NP01H080D050BA, "CAP CER 8PF 50V NP0 0402", Device Package="0402 (1005 Metric)", Manufacturer="TDK Corporation", Operating Temperature="-55°C ~ 150°C", Supplier Part Number 1=445-13781-1-ND, Temperature Coefficient="C0G, NP0", Tolerance=±0.5pF, Voltage - Rated=50V, Applications="General Purpose", Capacitance=8pF, ComponentLink1Description=Datasheet, ComponentLink1URL=https://product.tdk.com/info/en/catalog/datasheets/mlcc_commercial_hightemp_en.pdf?ref_disty=digikey, ComponentLink2Description="DigiKey Link", ComponentLink2URL=http://digikey.com/product-detail/en/tdk-corporation/C1005NP01H080D050BA/445-13781-1-ND/3955447, Features="High Temperature", LastUpdated="2020-09-02 1:02:24 AM", Lifecycle Status=Active, Minimum Order=1, Mounting Type="Surface Mount, MLCC", Package / Case="0402 (1005 Metric)", Packaging=TapeAndReel, Part Number=C1005NP01H080D050BA, Part Status=Active, PartId=2033, Price=0.01, Series=C, Size / Dimension="0.039\" L x 0.020\" W (1.00mm x 0.50mm)", Supplier 1=DigiKey, Thickness (Max)="0.022\" (0.55mm)"
C23 C24: library part GRM033R61A105ME15D, "CAP CER 1UF 10V X5R 0201", Device Package="0201 (0603 Metric)", Manufacturer="Murata Electronics", Operating Temperature="-55°C ~ 85°C", Supplier Part Number 1=490-13226-1-ND, Temperature Coefficient=X5R, Tolerance=±20%, Voltage - Rated=10V, Applications="General Purpose", Capacitance=1µF, ComponentLink1Description=Datasheet, ComponentLink1URL=https://www.murata.com/~/media/webrenewal/support/library/catalog/products/capacitor/mlcc/c02e.ashx?la=en-us, ComponentLink2Description="DigiKey Link", ComponentLink2URL=http://digikey.com/product-detail/en/murata-electronics/GRM033R61A105ME15D/490-13226-1-ND/5877434, LastUpdated="2020-09-02 1:00:12 AM", Lifecycle Status=Active, Minimum Order=1, Mounting Type="Surface Mount, MLCC", Package / Case="0201 (0603 Metric)", Packaging=TapeAndReel, Part Number=GRM033R61A105ME15D, Part Status=Active, PartId=90, Price=0.07, Series=GRM, Size / Dimension="0.024\" L x 0.012\" W (0.60mm x 0.30mm)", Supplier 1=DigiKey, Thickness (Max)="0.015\" (0.39mm)"
C26: library part GRM033R61A225ME47D, "CAP CER 2.2UF 10V X5R 0201", Device Package="0201 (0603 Metric)", Manufacturer="Murata Electronics", Operating Temperature="-55°C ~ 85°C", Supplier Part Number 1=490-13228-1-ND, Temperature Coefficient=X5R, Tolerance=±20%, Voltage - Rated=10V, Applications="General Purpose", Capacitance=2.2µF, ComponentLink1Description=Datasheet, ComponentLink1URL=https://www.murata.com/~/media/webrenewal/support/library/catalog/products/capacitor/mlcc/c02e.ashx?la=en-us, ComponentLink2Description="DigiKey Link", ComponentLink2URL=http://digikey.com/product-detail/en/murata-electronics/GRM033R61A225ME47D/490-13228-1-ND/5877436, LastUpdated="2020-09-02 12:59:45 AM", Lifecycle Status=Active, Minimum Order=1, Mounting Type="Surface Mount, MLCC", Package / Case="0201 (0603 Metric)", Packaging=TapeAndReel, Part Number=GRM033R61A225ME47D, Part Status=Active, PartId=406, Price=0.04, Series=GRM, Size / Dimension="0.024\" L x 0.012\" W (0.60mm x 0.30mm)", Supplier 1=DigiKey, Thickness (Max)="0.015\" (0.39mm)"
C27: library part GRM035R60J475ME15D, "CAP CER 4.7UF 6.3V X5R 0201", Device Package="0201 (0603 Metric)", Manufacturer="Murata Electronics", Operating Temperature="-55°C ~ 85°C", Supplier Part Number 1=490-13230-1-ND, Temperature Coefficient=X5R, Tolerance=±20%, Voltage - Rated=6.3V, Applications="General Purpose", Capacitance=4.7µF, ComponentLink1Description=Datasheet, ComponentLink1URL=https://psearch.en.murata.com/capacitor/product/GRM035R60J475ME15%23.pdf, ComponentLink2Description="DigiKey Link", ComponentLink2URL=http://digikey.com/product-detail/en/murata-electronics/GRM035R60J475ME15D/490-13230-1-ND/5877438, LastUpdated="2020-09-02 12:58:52 AM", Lifecycle Status=Active, Minimum Order=1, Mounting Type="Surface Mount, MLCC", Package / Case="0201 (0603 Metric)", Packaging=TapeAndReel, Part Number=GRM035R60J475ME15D, Part Status=Active, PartId=1018, Price=0.09, Series=GRM, Size / Dimension="0.024\" L x 0.012\" W (0.60mm x 0.30mm)", Supplier 1=DigiKey, Thickness (Max)="0.022\" (0.55mm)"
D1: library part EAST10052GA0, "LED GREEN CLEAR 2SMD", Current - Test=5mA, Device Package="0402 (1005 Metric)", Lens Color=Colorless, Manufacturer="Everlight Electronics Co Ltd", Supplier Device Package=2-SMD, Supplier Part Number 1=1080-1557-1-ND, Voltage - Forward (Vf) (Typ)=2.95V, Color=Green, ComponentLink1Description=Datasheet, ComponentLink1URL=https://everlightamericas.com/index.php?controller=attachment&id_attachment=3256, ComponentLink2Description="DigiKey Link", ComponentLink2URL=http://digikey.com/product-detail/en/everlight-electronics-co-ltd/EAST10052GA0/1080-1557-1-ND/8510385, Configuration=Standard, Height (Max)=0.25mm, LastUpdated="2020-09-02 1:20:38 AM", Lens Size="1.00mm x 0.50mm", Lens Style="Rectangle with Flat Top", Lens Transparency=Clear, Lifecycle Status=Active, Minimum Order=1, Mounting Type="Surface Mount", Package / Case="0402 (1005 Metric)", Packaging=TapeAndReel, Part Number=EAST10052GA0, Part Status=Active, PartId=696, Price=0.08, Series=-, Size / Dimension="1.00mm L x 0.50mm W", Supplier 1=DigiKey, Viewing Angle=120°, Wavelength - Peak=518nm
D2: library part APG1005SYC-T, "LED YELLOW CLEAR CHIP SMD", Current - Test=20mA, Device Package="0402 (1005 Metric)", Lens Color=Colorless, Manufacturer=Kingbright, Millicandela Rating=100mcd, Supplier Device Package="Chip LED", Supplier Part Number 1=754-1809-1-ND, Voltage - Forward (Vf) (Typ)=2.05V, Color=Yellow, ComponentLink1Description=Datasheet, ComponentLink1URL=http://www.kingbrightusa.com/images/catalog/SPEC/APG1005SYC-T.pdf, ComponentLink2Description="DigiKey Link", ComponentLink2URL=http://digikey.com/product-detail/en/kingbright/APG1005SYC-T/754-1809-1-ND/4764945, Configuration=Standard, Height (Max)=0.25mm, LastUpdated="2020-09-02 1:21:13 AM", Lens Size="0.60mm x 0.50mm", Lens Style="Rectangle with Flat Top", Lens Transparency=Clear, Lifecycle Status=Active, Minimum Order=1, Mounting Type="Surface Mount", Package / Case="0402 (1005 Metric)", Packaging=TapeAndReel, Part Number=APG1005SYC-T, Part Status=Active, PartId=173, Price=0.10, Series=-, Size / Dimension="1.00mm L x 0.50mm W", Supplier 1=DigiKey, Viewing Angle=120°, Wavelength - Dominant=589nm, Wavelength - Peak=591nm
D5: library part APHHS1005QBC/D, "LED BLUE CLEAR CHIP SMD", Current - Test=20mA, Device Package="0402 (1005 Metric)", Lens Color=Colorless, Manufacturer=Kingbright, Millicandela Rating=60mcd, Supplier Device Package="Chip LED", Supplier Part Number 1=754-1504-1-ND, Voltage - Forward (Vf) (Typ)=3.3V, Color=Blue, ComponentLink1Description=Datasheet, ComponentLink1URL=http://www.kingbrightusa.com/images/catalog/SPEC/APHHS1005QBC-D.pdf, ComponentLink2Description="DigiKey Link", ComponentLink2URL=http://digikey.com/product-detail/en/kingbright/APHHS1005QBC-D/754-1504-1-ND/2263581, Configuration=Standard, Height (Max)=0.60mm, LastUpdated="2020-09-02 1:20:21 AM", Lens Size="0.80mm x 0.50mm", Lens Style="Rectangle with Flat Top", Lens Transparency=Clear, Lifecycle Status=Active, Minimum Order=1, Mounting Type="Surface Mount", Package / Case="0402 (1005 Metric)", Packaging=TapeAndReel, Part Number=APHHS1005QBC/D, Part Status=Active, PartId=862, Price=0.13, Series=-, Size / Dimension="1.00mm L x 0.50mm W", Supplier 1=DigiKey, Viewing Angle=120°, Wavelength - Dominant=465nm, Wavelength - Peak=460nm
FB1: library part 742792023, "FERRITE BEAD 120 OHM 0805 1LN", Current Rating (Max)=3A, DC Resistance (DCR) (Max)=30mOhm, Device Package="0805 (2012 Metric)", Manufacturer="Würth Elektronik", Operating Temperature="-55°C ~ 125°C", Supplier Part Number 1=732-1613-1-ND, ComponentLink1Description=Datasheet, ComponentLink1URL=https://katalog.we-online.de/pbs/datasheet/742792023.pdf, ComponentLink2Description="DigiKey Link", ComponentLink2URL=http://digikey.com/product-detail/en/w-rth-elektronik/742792023/732-1613-1-ND/1639557, Filter Type="Signal Line", Height (Max)="0.043\" (1.10mm)", Impedance @ Frequency="120 Ohms @ 100MHz", LastUpdated="2020-09-02 1:18:22 AM", Lifecycle Status=Active, Minimum Order=1, Mounting Type="Surface Mount", Number of Lines=1, Package / Case="0805 (2012 Metric)", Packaging=TapeAndReel, Part Number=742792023, Part Status=Active, PartId=1352, Price=0.14, Series=WE-CBF, Size / Dimension="0.079\" L x 0.047\" W (2.00mm x 1.20mm)", Supplier 1=DigiKey
IC1: "IC MCU 32BIT 512KB FLASH 64LQFP", Device Package=64-LQFP, Manufacturer=STMicroelectronics, Supplier Device Package="64-LQFP (10x10)", Supplier Part Number 1=497-16775-ND, Voltage - Supply (Vcc/Vdd)="1.7V ~ 3.6V", ComponentLink1Description=Datasheet, ComponentLink1URL=http://www.st.com/content/ccc/resource/technical/document/datasheet/65/cb/75/50/53/d6/48/24/DM00141306.pdf/files/DM00141306.pdf/jcr:content/translations/en.DM00141306.pdf, ComponentLink2Description="DigiKey Link", ComponentLink2URL=http://digikey.com/product-detail/en/stmicroelectronics/STM32F446RET7/497-16775-ND/6207480, Connectivity="CANbus, EBI/EMI, I²C, IrDA, LINbus, SAI, SD, SPDIF-Rx, SPI, UART/USART, USB, USB OTG", Core Processor="ARM® Cortex®-M4", Core Size=32-Bit, Data Converters="A/D 16x12b; D/A 2x12b", LastUpdated="2020-08-30 9:03:14 PM", Lifecycle Status=Active, Minimum Order=1, Mounting Type="Surface Mount", Number of I/O=50, Oscillator Type=Internal, Package / Case=64-LQFP, Packaging=Tray, Part Number=STM32F446RET7, PartId=220, Peripherals="Brown-out Detect/Reset, DMA, I²S, LVD, POR, PWM, WDT", Price=8.42, Program Memory Size="512KB (512K x 8)", Program Memory Type=FLASH, RAM Size="128K x 8", Series=STM32F4, Speed=180MHz, Supplier 1=DigiKey
IC2: "IC REG LINEAR 3.3V 600MA SOT25", Current - Output=600mA, Current - Quiescent (Iq)=80µA, Manufacturer="Diodes Incorporated", Operating Temperature="-40°C ~ 85°C", Package / Case="SC-74A, SOT-753", Supplier Device Package=SOT-25, Supplier Part Number 1=AP2112K-3.3TRG1DICT-ND, Voltage - Input (Max)=6V, Voltage - Output (Min/Fixed)=3.3V, Voltage Dropout (Max)="0.4V @ 600mA", ComponentLink1Description=Datasheet, ComponentLink1URL=https://www.diodes.com/assets/Datasheets/AP2112.pdf, ComponentLink2Description="DigiKey Link", ComponentLink2URL=http://digikey.com/product-detail/en/diodes-incorporated/AP2112K-3.3TRG1/AP2112K-3.3TRG1DICT-ND/4505257, Control Features=Enable, LastUpdated="2020-09-02 1:25:56 AM", Lifecycle Status=Active, Minimum Order=1, Mounting Type="Surface Mount", Number of Regulators=1, Output Configuration=Positive, Output Type=Fixed, Packaging=TapeAndReel, Part Number=AP2112K-3.3TRG1, Part Status=Active, Price=0.10, Protection Features="Over Current, Over Temperature", PSRR="65sB (100Hz ~ 1KHz)", Series=-, Supplier 1=DigiKey
IC3 IC4: "IC TRANSCEIVER 1/1 8DFN", Device Package="8-VDFN Exposed Pad", Manufacturer="Microchip Technology", Operating Temperature="-40°C ~ 125°C", Supplier Device Package="8-DFN (3x3)", Supplier Part Number 1=MCP2542FDT-E/MFCT-ND, Voltage - Supply="4.5V ~ 5.5V", ComponentLink1Description=Datasheet, ComponentLink1URL=http://www.microchip.com/mymicrochip/filehandler.aspx?ddocname=en585412, ComponentLink2Description="DigiKey Link", ComponentLink2URL=http://digikey.com/product-detail/en/microchip-technology/MCP2542FDT-E-MF/MCP2542FDT-E-MFCT-ND/5975779, Data Rate=8Mbps, LastUpdated="2020-05-24 11:09:12 PM", Lifecycle Status=Active, Minimum Order=1, Mounting Type="Surface Mount", Number of Drivers/Receivers=1/1, Package / Case="8-VDFN Exposed Pad", Packaging=TapeAndReel, Part Number=MCP2542FDT-E/MF, Part Status=Active, Price=0.62, Protocol=CANbus, Receiver Hysteresis=200mV, Series=-, Supplier 1=DigiKey, Type=Transceiver
IC5: "MOSFET P-CH 30V SOT23", Current - Continuous Drain (Id) @ 25°C="3.8A (Ta)", Drain to Source Voltage (Vdss)=30V, Drive Voltage (Max Rds On,  Min Rds On)="4.5V, 10V", Input Capacitance (Ciss) (Max) @ Vds="563pF @ 25V", Manufacturer="Diodes Incorporated", Operating Temperature="-55°C ~ 150°C (TJ)", Package / Case="TO-236-3, SC-59, SOT-23-3", Power Dissipation (Max)="1.08W (Ta)", Supplier Device Package=SOT-23, Supplier Part Number 1=DMP3099L-7DICT-ND, ComponentLink1Description=Datasheet, ComponentLink1URL=https://www.diodes.com/assets/Datasheets/DMP3099L.pdf, ComponentLink2Description="DigiKey Link", ComponentLink2URL=http://digikey.com/product-detail/en/diodes-incorporated/DMP3099L-7/DMP3099L-7DICT-ND/5218217, FET Type=P-Channel, Gate Charge (Qg) (Max) @ Vgs="5.2nC @ 4.5V", LastUpdated="2020-09-02 1:25:04 AM", Lifecycle Status=Active, Minimum Order=1, Mounting Type="Surface Mount", Packaging=TapeAndReel, Part Number=DMP3099L-7, Part Status=Active, Price=0.06, Rds On (Max) @ Id, Vgs="65mOhm @ 3.8A, 10V", Series=-, Supplier 1=DigiKey, Technology="MOSFET (Metal Oxide)", Vgs (Max)=±20V, Vgs(th) (Max) @ Id="2.1V @ 250µA"
IC6: "IC OR CTRLR SRC SELECT 8MSOP", Current - Supply=31µA, Device Package="8-TSSOP, 8-MSOP (0.118\", 3.00mm Width)", Manufacturer="Linear Technology/Analog Devices", Operating Temperature="-40°C ~ 125°C", Supplier Device Package=8-MSOP, Supplier Part Number 1=LTC4414IMS8#PBF-ND, Voltage - Supply="3V ~ 36V", Applications="Battery Backup, Industrial/Automotive, High Current Switch", ComponentLink1Description=Datasheet, ComponentLink1URL=http://www.linear.com/docs/9037, ComponentLink2Description="DigiKey Link", ComponentLink2URL=http://digikey.com/product-detail/en/linear-technology-analog-devices/LTC4414IMS8-PBF/LTC4414IMS8-PBF-ND/1620227, Delay Time - OFF=20µs, Delay Time - ON=600µs, FET Type=P-Channel, Internal Switch(s)=No, LastUpdated="2020-02-02 11:30:38 AM", Lifecycle Status=Active, Minimum Order=1, Mounting Type="Surface Mount", Package / Case="8-TSSOP, 8-MSOP (0.118\", 3.00mm Width)", Packaging=Tube, Part Number=LTC4414IMS8#PBF, Part Status=Active, Price=4.97, Ratio - Input:Output=2:1, Series=PowerPath™, Supplier 1=DigiKey, Type="Source Selector Switch"
IC7: "IC MCU 32BIT 128KB FLASH 48LQFP", Device Package=48-LQFP, Manufacturer=STMicroelectronics, Operating Temperature="-40°C ~ 85°C (TA)", Supplier Part Number 1=497-6288-ND, Voltage - Supply (Vcc/Vdd)="2V ~ 3.6V", ComponentLink1Description=Datasheet, ComponentLink1URL=https://www.st.com/resource/en/datasheet/stm32f103cb.pdf, ComponentLink2Description="DigiKey Link", ComponentLink2URL=http://digikey.com/product-detail/en/stmicroelectronics/STM32F103CBT6/497-6288-ND/1754420, Connectivity="CANbus, I²C, IrDA, LINbus, SPI, UART/USART, USB", Core Processor="ARM® Cortex®-M3", Core Size=32-Bit, Data Converters="A/D 10x12b", LastUpdated="2020-05-24 10:49:18 PM", Lifecycle Status=Active, Minimum Order=1, Mounting Type="Surface Mount", Number of I/O=37, Oscillator Type=Internal, Package / Case=48-LQFP, Packaging=Tray, Part Number=STM32F103CBT6, Part Status=Active, PartId=194, Peripherals="DMA, Motor Control PWM, PDR, POR, PVD, PWM, Temp Sensor, WDT", Price=5.25, Program Memory Size="128KB (128K x 8)", Program Memory Type=FLASH, RAM Size="20K x 8", Series=STM32F1, Speed=72MHz, Supplier 1=DigiKey
J1: "CONN RCPT MINI USB B 5POS SMD RA", Current Rating (Amps)="1A per Contact", Manufacturer="Amphenol ICC (FCI)", Operating Temperature="-25°C ~ 85°C", Supplier Part Number 1=609-4700-2-ND, Voltage - Rated=30V, ComponentLink1Description=Datasheet, ComponentLink1URL=http://www.amphenol-icc.com/media/wysiwyg/files/drawing/10033526.pdf, ComponentLink2Description="DigiKey Link", ComponentLink2URL=//digikey.com/product-detail/en/amphenol-icc-fci/10033526-N3212LF/609-4700-2-ND/4292074, Connector Type="USB - mini B", Features="Board Guide, Solder Retention", Gender=Receptacle, LastUpdated="2019-12-09 8:52:14 PM", Lifecycle Status=0, Mating Cycles=5000, Minimum Order=1, Mounting Feature=Horizontal, Mounting Type="Surface Mount, Right Angle", Number of Contacts=5, Number of Ports=1, Packaging=TapeAndReel, Part Number=10033526-N3212LF, Part Status=Active, Price=0.39, Series=-, Shielding=Shielded, Supplier 1=DigiKey, Termination=Solder
P1 P2: "Header, 14-Pin", LatestRevisionDate=17-Jul-2002, LatestRevisionNote="Re-released for DXP Platform.", Publisher="Altium Limited"
R1: library part CRCW02011K50FKED, "RES SMD 1.5K OHM 1% 1/20W 0201", Device Package="0201 (0603 Metric)", Manufacturer="Vishay Dale", Operating Temperature="-55°C ~ 155°C", Power (Watts)="0.05W, 1/20W", Supplier Device Package=0201, Supplier Part Number 1=541-1.50KAABCT-ND, Temperature Coefficient=±100ppm/°C, Tolerance=±1%, ComponentLink1Description=Datasheet, ComponentLink1URL=http://www.vishay.com/docs/20052/crcw0201e3.pdf, ComponentLink2Description="DigiKey Link", ComponentLink2URL=http://digikey.com/product-detail/en/vishay-dale/CRCW02011K50FKED/541-1.50KAABCT-ND/1968219, Composition="Thick Film", Height - Seated (Max)="0.011\" (0.28mm)", LastUpdated="2020-09-02 1:06:22 AM", Lifecycle Status=Active, Minimum Order=1, Number of Terminations=2, Package / Case="0201 (0603 Metric)", Packaging=TapeAndReel, Part Number=CRCW02011K50FKED, Part Status=Active, PartId=841, Price=0.03, Resistance="1.5 kOhms", Series=CRCW, Size / Dimension="0.024\" L x 0.012\" W (0.60mm x 0.30mm)", Supplier 1=DigiKey
R2: library part RP73PF1E100KBTD, "RES 100K OHM 0.1% 1/10W 0402", Device Package="0402 (1005 Metric)", Manufacturer="TE Connectivity Passive Product", Operating Temperature="-55°C ~ 155°C", Power (Watts)="0.1W, 1/10W", Supplier Device Package=0402, Supplier Part Number 1=A127511CT-ND, Temperature Coefficient=±25ppm/°C, Tolerance=±0.1%, ComponentLink1Description=Datasheet, ComponentLink1URL=https://www.te.com/commerce/DocumentDelivery/DDEController?Action=srchrtrv&DocNm=1773272&DocType=DS&DocLang=English, ComponentLink2Description="DigiKey Link", ComponentLink2URL=http://digikey.com/product-detail/en/te-connectivity-passive-product/RP73PF1E100KBTD/A127511CT-ND/8261477, Composition="Thin Film", Height - Seated (Max)="0.014\" (0.35mm)", LastUpdated="2020-09-02 1:08:10 AM", Lifecycle Status=Active, Minimum Order=1, Number of Terminations=2, Package / Case="0402 (1005 Metric)", Packaging=TapeAndReel, Part Number=RP73PF1E100KBTD, Part Status=Active, PartId=2436, Price=0.08, Resistance="100 kOhms", Series="RP73P, Holsworthy", Size / Dimension="0.039\" L x 0.020\" W (1.00mm x 0.50mm)", Supplier 1=DigiKey
R3 R12: library part CRG0201F100K, "RES SMD 100K OHM 1% 1/20W 0201", Device Package="0201 (0603 Metric)", Manufacturer="TE Connectivity Passive Product", Operating Temperature="-55°C ~ 155°C", Power (Watts)="0.05W, 1/20W", Supplier Device Package=0201, Supplier Part Number 1=A129572CT-ND, Temperature Coefficient=±200ppm/°C, Tolerance=±1%, ComponentLink1Description=Datasheet, ComponentLink1URL=https://www.te.com/commerce/DocumentDelivery/DDEController?Action=srchrtrv&DocNm=1773204&DocType=DS&DocLang=English, ComponentLink2Description="DigiKey Link", ComponentLink2URL=http://digikey.com/product-detail/en/te-connectivity-passive-product/CRG0201F100K/A129572CT-ND/8566776, Composition="Thick Film", Height - Seated (Max)="0.010\" (0.26mm)", LastUpdated="2020-09-02 1:06:26 AM", Lifecycle Status=Active, Minimum Order=1, Number of Terminations=2, Package / Case="0201 (0603 Metric)", Packaging=TapeAndReel, Part Number=CRG0201F100K, Part Status=Active, PartId=2, Price=0.02, Resistance="100 kOhms", Series="CRG, Neohm", Size / Dimension="0.024\" L x 0.012\" W (0.60mm x 0.30mm)", Supplier 1=DigiKey
R4: library part AC0201FR-07340RL, "RES SMD 340 OHM 1% 1/20W 0201", Device Package="0201 (0603 Metric)", Manufacturer=Yageo, Operating Temperature="-55°C ~ 155°C", Power (Watts)="0.05W, 1/20W", Ratings=AEC-Q200, Supplier Device Package=0201, Supplier Part Number 1=YAG5199CT-ND, Temperature Coefficient=±200ppm/°C, Tolerance=±1%, ComponentLink1Description=Datasheet, ComponentLink1URL=https://www.yageo.com/upload/media/product/productsearch/datasheet/rchip/PYu-AC_51_RoHS_L_7.pdf, ComponentLink2Description="DigiKey Link", ComponentLink2URL=http://digikey.com/product-detail/en/yageo/AC0201FR-07340RL/YAG5199CT-ND/7063542, Composition="Thick Film", Features="Automotive AEC-Q200, Moisture Resistant", Height - Seated (Max)="0.010\" (0.26mm)", LastUpdated="2020-09-02 1:06:25 AM", Lifecycle Status=Active, Minimum Order=1, Number of Terminations=2, Package / Case="0201 (0603 Metric)", Packaging=TapeAndReel, Part Number=AC0201FR-07340RL, Part Status=Active, PartId=145, Price=0.01, Resistance="340 Ohms", Series=AC, Size / Dimension="0.024\" L x 0.012\" W (0.60mm x 0.30mm)", Supplier 1=DigiKey
R5 R17: library part RK73H1HTTC2200F, "RES 220 OHM 1% 1/20W 0201", Device Package="0201 (0603 Metric)", Manufacturer="KOA Speer Electronics, Inc.", Operating Temperature="-55°C ~ 155°C", Power (Watts)="0.05W, 1/20W", Ratings=AEC-Q200, Supplier Device Package=0201, Supplier Part Number 1=2019-RK73H1HTTC2200FCT-ND, Temperature Coefficient=±200ppm/°C, Tolerance=±1%, ComponentLink1Description=Datasheet, ComponentLink1URL=http://www.koaspeer.com/catimages/Products/RK73H/RK73H.pdf, ComponentLink2Description="DigiKey Link", ComponentLink2URL=http://digikey.com/product-detail/en/koa-speer-electronics-inc/RK73H1HTTC2200F/2019-RK73H1HTTC2200FCT-ND/9845845, Composition="Thick Film", Features="Automotive AEC-Q200, Moisture Resistant", Height - Seated (Max)="0.010\" (0.26mm)", LastUpdated="2020-09-02 1:06:23 AM", Lifecycle Status=Active, Minimum Order=1, Number of Terminations=2, Package / Case="0201 (0603 Metric)", Packaging=TapeAndReel, Part Number=RK73H1HTTC2200F, Part Status=Active, PartId=624, Price=0.01, Resistance="220 Ohms", Series=RK73H, Size / Dimension="0.024\" L x 0.012\" W (0.60mm x 0.30mm)", Supplier 1=DigiKey
R6 R7: library part CRCW02014K70FKED, "RES SMD 4.7K OHM 1% 1/20W 0201", Device Package="0201 (0603 Metric)", Manufacturer="Vishay Dale", Operating Temperature="-55°C ~ 155°C", Power (Watts)="0.05W, 1/20W", Supplier Device Package=0201, Supplier Part Number 1=541-4.70KAABCT-ND, Temperature Coefficient=±100ppm/°C, Tolerance=±1%, ComponentLink1Description=Datasheet, ComponentLink1URL=http://www.vishay.com/docs/20052/crcw0201e3.pdf, ComponentLink2Description="DigiKey Link", ComponentLink2URL=http://digikey.com/product-detail/en/vishay-dale/CRCW02014K70FKED/541-4.70KAABCT-ND/1968253, Composition="Thick Film", Height - Seated (Max)="0.011\" (0.28mm)", LastUpdated="2020-09-02 1:06:25 AM", Lifecycle Status=Active, Minimum Order=1, Number of Terminations=2, Package / Case="0201 (0603 Metric)", Packaging=TapeAndReel, Part Number=CRCW02014K70FKED, Part Status=Active, PartId=37, Price=0.03, Resistance="4.7 kOhms", Series=CRCW, Size / Dimension="0.024\" L x 0.012\" W (0.60mm x 0.30mm)", Supplier 1=DigiKey
R8: library part AC0402FR-07100KL, "RES SMD 100K OHM 1% 1/16W 0402", Device Package="0402 (1005 Metric)", Manufacturer=Yageo, Operating Temperature="-55°C ~ 155°C", Power (Watts)="0.063W, 1/16W", Ratings=AEC-Q200, Supplier Device Package=0402, Supplier Part Number 1=YAG3434CT-ND, Temperature Coefficient=±100ppm/°C, Tolerance=±1%, ComponentLink1Description=Datasheet, ComponentLink1URL=https://www.yageo.com/upload/media/product/productsearch/datasheet/rchip/PYu-AC_51_RoHS_L_7.pdf, ComponentLink2Description="DigiKey Link", ComponentLink2URL=http://digikey.com/product-detail/en/yageo/AC0402FR-07100KL/YAG3434CT-ND/6006283, Composition="Thick Film", Features="Automotive AEC-Q200, Moisture Resistant", Height - Seated (Max)="0.015\" (0.37mm)", LastUpdated="2020-09-02 1:07:50 AM", Lifecycle Status=Active, Minimum Order=1, Number of Terminations=2, Package / Case="0402 (1005 Metric)", Packaging=CutTape, Part Number=AC0402FR-07100KL, Part Status=Active, PartId=12047, Price=0.10, Resistance="100 kOhms", Series=AC, Size / Dimension="0.039\" L x 0.020\" W (1.00mm x 0.50mm)", Supplier 1=DigiKey
R9 R10 R16: library part CRCW020110K0FKED, "RES SMD 10K OHM 1% 1/20W 0201", Device Package="0201 (0603 Metric)", Manufacturer="Vishay Dale", Operating Temperature="-55°C ~ 155°C", Power (Watts)="0.05W, 1/20W", Supplier Device Package=0201, Supplier Part Number 1=541-10.0KAABCT-ND, Temperature Coefficient=±100ppm/°C, Tolerance=±1%, ComponentLink1Description=Datasheet, ComponentLink1URL=http://www.vishay.com/docs/20052/crcw0201e3.pdf, ComponentLink2Description="DigiKey Link", ComponentLink2URL=http://digikey.com/product-detail/en/vishay-dale/CRCW020110K0FKED/541-10.0KAABCT-ND/1968173, Composition="Thick Film", Height - Seated (Max)="0.011\" (0.28mm)", LastUpdated="2020-09-02 1:06:25 AM", Lifecycle Status=Active, Minimum Order=1, Number of Terminations=2, Package / Case="0201 (0603 Metric)", Packaging=TapeAndReel, Part Number=CRCW020110K0FKED, Part Status=Active, PartId=29, Price=0.03, Resistance="10 kOhms", Series=CRCW, Size / Dimension="0.024\" L x 0.012\" W (0.60mm x 0.30mm)", Supplier 1=DigiKey
R11: library part 5113, "0402 JUMPER ON TAPE AND REEL", Device Package="0402 (1005 Metric)", Manufacturer="Keystone Electronics", Power (Watts)="0.5W, 1/2W", Supplier Device Package=0402, Supplier Part Number 1=36-5113-1-ND, Tolerance=Jumper, ComponentLink1Description=Datasheet, ComponentLink1URL=http://www.keystoneelectronics.net/ENG._DEPT/WEB_ORACLE/PDF/PDF%20CAT%20NO%20DRAWINGS/5000-5999/5113.PDF, ComponentLink2Description="DigiKey Link", ComponentLink2URL=http://digikey.com/product-detail/en/keystone-electronics/5113/36-5113-1-ND/9921856, Composition="Metal Element", Height - Seated (Max)="0.020\" (0.50mm)", LastUpdated="2020-09-02 1:07:39 AM", Lifecycle Status=Active, Minimum Order=1, Number of Terminations=2, Package / Case="0402 (1005 Metric)", Packaging=TapeAndReel, Part Number=5113, Part Status=Active, PartId=16398, Price=0.16, Series=-, Size / Dimension="0.039\" L x 0.020\" W (1.00mm x 0.50mm)", Supplier 1=DigiKey
R13: library part CRCW0201100RFKED, "RES SMD 100 OHM 1% 1/20W 0201", Device Package="0201 (0603 Metric)", Manufacturer="Vishay Dale", Operating Temperature="-55°C ~ 155°C", Power (Watts)="0.05W, 1/20W", Supplier Device Package=0201, Supplier Part Number 1=541-100AABCT-ND, Temperature Coefficient=±100ppm/°C, Tolerance=±1%, ComponentLink1Description=Datasheet, ComponentLink1URL=http://www.vishay.com/docs/20052/crcw0201e3.pdf, ComponentLink2Description="DigiKey Link", ComponentLink2URL=http://digikey.com/product-detail/en/vishay-dale/CRCW0201100RFKED/541-100AABCT-ND/1968157, Composition="Thick Film", Height - Seated (Max)="0.011\" (0.28mm)", LastUpdated="2020-09-02 1:06:25 AM", Lifecycle Status=Active, Minimum Order=1, Number of Terminations=2, Package / Case="0201 (0603 Metric)", Packaging=TapeAndReel, Part Number=CRCW0201100RFKED, Part Status=Active, PartId=33, Price=0.03, Resistance="100 Ohms", Series=CRCW, Size / Dimension="0.024\" L x 0.012\" W (0.60mm x 0.30mm)", Supplier 1=DigiKey
R18: library part RC0201FR-07120RL, "RES SMD 120 OHM 1% 1/20W 0201", Device Package="0201 (0603 Metric)", Manufacturer=Yageo, Operating Temperature="-55°C ~ 125°C", Power (Watts)="0.05W, 1/20W", Supplier Device Package=0201, Supplier Part Number 1=311-120MCT-ND, Temperature Coefficient=±200ppm/°C, Tolerance=±1%, ComponentLink1Description=Datasheet, ComponentLink1URL=https://www.yageo.com/upload/media/product/productsearch/datasheet/rchip/PYu-RC_Group_51_RoHS_L_10.pdf, ComponentLink2Description="DigiKey Link", ComponentLink2URL=http://digikey.com/product-detail/en/yageo/RC0201FR-07120RL/311-120MCT-ND/1948982, Composition="Thick Film", Features="Moisture Resistant", Height - Seated (Max)="0.010\" (0.26mm)", LastUpdated="2020-09-02 1:06:20 AM", Lifecycle Status=Active, Minimum Order=1, Number of Terminations=2, Package / Case="0201 (0603 Metric)", Packaging=CutTape, Part Number=RC0201FR-07120RL, Part Status=Active, PartId=1387, Price=0.10, Resistance="120 Ohms", Series=RC, Size / Dimension="0.024\" L x 0.012\" W (0.60mm x 0.30mm)", Supplier 1=DigiKey
S1 S2: "SWITCH TACTILE SPST-NO 0.02A 15V", Contact Rating @ Voltage="0.02A @ 15VDC", Manufacturer=C&K, Operating Force=330gf, Operating Temperature="-40°C ~ 85°C", Supplier Part Number 1=CKN10781CT-ND, Actuator Height off PCB, Vertical=0.60mm, Actuator Orientation="Top Actuated", Actuator Type=Standard, Circuit=SPST-NO, ComponentLink1Description=Datasheet, ComponentLink1URL=https://dznh3ojzb2azq.cloudfront.net/products/Tactile/KXT3/documents/datasheet.pdf, ComponentLink2Description="DigiKey Link", ComponentLink2URL=http://digikey.com/product-detail/en/c-k/KXT341-LHS/CKN10781CT-ND/6607324, Illumination=Non-Illuminated, LastUpdated="2020-09-02 1:27:07 AM", Lifecycle Status=Active, Minimum Order=1, Mounting Type="Surface Mount", Outline="3.00mm x 2.00mm", Packaging=TapeAndReel, Part Number="KXT341 LHS", Part Status=Active, Price=0.14, Series=KXT3, Supplier 1=DigiKey, Switch Function=Off-Mom, Termination Style="SMD (SMT) Tab"
TP1 TP2: library part TP1
Y1 Y2: library part NX3225GD-8MHZ-STD-CRA-3, "CRYSTAL 8.0000MHZ 8PF SMD", ESR (Equivalent Series Resistance)="500 Ohms", Frequency Stability=±150ppm, Frequency Tolerance=±50ppm, Load Capacitance=8pF, Manufacturer="NDK America, Inc.", Operating Mode=Fundamental, Operating Temperature="-40°C ~ 150°C", Package / Case="2-SMD, No Lead", Ratings=AEC-Q200, Supplier Part Number 1=644-1178-1-ND, ComponentLink1Description=Datasheet, ComponentLink1URL=http://www.ndk.com/images/products/catalog/c_NX3225GD-STD-CRA-3_e.pdf, ComponentLink2Description="DigiKey Link", ComponentLink2URL=http://digikey.com/product-detail/en/ndk-america-inc/NX3225GD-8MHZ-STD-CRA-3/644-1178-1-ND/3125567, Frequency=8MHz, Height - Seated (Max)="0.039\" (1.00mm)", LastUpdated="2020-09-02 1:25:56 AM", Lifecycle Status=Active, Minimum Order=1, Mounting Type="Surface Mount", Packaging=TapeAndReel, Part Number=NX3225GD-8MHZ-STD-CRA-3, Part Status=Active, PartId=744, Price=0.48, Series=NX3225GD, Size / Dimension="0.126\" L x 0.098\" W (3.20mm x 2.50mm)", Supplier 1=DigiKey, Type="MHz Crystal"

## Via types
v1: diameter 23.62, hole 11.81, Top Layer to Bottom Layer, 88 vias

## Nets (pads, with @x,y where several pads share a name; then routed paths per layer and width w, separated by ;. In a path a pad name is that pad's centre, name@x,y a point inside that pad or via, vN(x,y) a via of type N, cw(c..) or ccw(c..) an arc to the next point about the centre after c; other vN are vias at no path point)
BOOT0_DEB: IC7.44 R8.2 | length 200.6
  Top Layer w8: IC7.44 345.47,787.97 v1(400,842.5)
  Bottom Layer w8: v1(400,842.5) 420,862.5 R8.2
BOOT1_DEB: IC7.20 R11.2 | length 82.6
  Top Layer w8: IC7.20 646.06,847.03 675,818.09 R11.2
CAN1_N: IC3.6 P1.3 R18.1
CAN1_P: IC3.7 P1.4 R18.2
CAN1_RX: IC1.44 IC3.4
CAN1_STBY: IC1.9 IC3.8
CAN1_TX: IC1.45 IC3.1
CAN2_N: IC4.6 P1.1
CAN2_P: IC4.7 P1.2
CAN2_RX: IC1.33 IC4.4
CAN2_STBY: IC1.10 IC4.8
CAN2_TX: IC1.34 IC4.1
DOSC_IN: C13.2 IC7.5 Y1.2 | length 185.4
  Top Layer w8: v1(402.6,752.5) 402.6,748.27 410.47,740.4 IC7.5
  Bottom Layer w8: Y1.2@385.28,735.18 v1(402.6,752.5)
  Bottom Layer w12: C13.2 Y1.2@385.28,735.18
DOSC_OUT: C14.2 IC7.6 Y1.1 | length 201.7
  Top Layer w8: IC7.6 430.16,705.26 v1(477.4,752.5)
  Bottom Layer w8: v1(477.4,752.5) Y1.1@494.72,735.18
  Bottom Layer w12: Y1.1@494.72,735.18 C14.2
DRST_n: C12.2 IC7.7 R12.1 S2.2 | length 143.7
  Top Layer w8: v1@442.5,599.23 449.92,606.65 449.92,650.1 IC7.7
  Bottom Layer w8: C12.2 C12.2@392.5,597.2 ; R12.1 392.5,557.8 C12.2@392.5,597.2 ; v1(440,592.5) 437.5,595 394.7,595 C12.2@392.5,597.2
GATE: IC5.1 IC6.8 | length 203.7
  Bottom Layer w20: IC6.8 545.98,1324.11 584.6,1285.5 584.6,1272.59 617.97,1239.22 633.28,1239.22 666.65,1205.85 666.65,1203.88 IC5.1
GND: C1.1 C2.1 C3.1 C4.1 C5.1 C6.1 C7.1 C8.1 C9.1 C10.1 C11.1 C12.1 C13.1 C14.1 C15.1 C16.1 C17.1 C18.1 C19.1 C20.1 C21.1 C22.1 C23.1 C24.1 C25.1 C26.2 C27.1 C28.1 C29.1 C30.1 C31.1 D1.2 D2.2 IC1.12 IC1.18 IC1.31 IC1.47 IC1.63 IC2.2 IC3.2 IC4.2 IC6.2 IC6.3 IC7.8 IC7.23 IC7.35 IC7.47 J1.5 J1.S P2.10 P2.11 R2.1 R7.1 R8.1 R9.2 R10.1 R11.1 R16.1 R17.2 S1.1 S2.1 | length 3195.6